# Altium PCB 2014_YaourtPhone_Antenne_PCB.PCBDOC
Units mil, origin at the board's own origin, x right, y up, seen from the top; angles counter-clockwise.
Board outline 1889.76 x 2540.48 mil, 4 copper layers (1-TOP, 2-GND, 3-SIGNAL, 4-BOTTOM); 27 components, 26 nets, 120 pads, 46 vias.
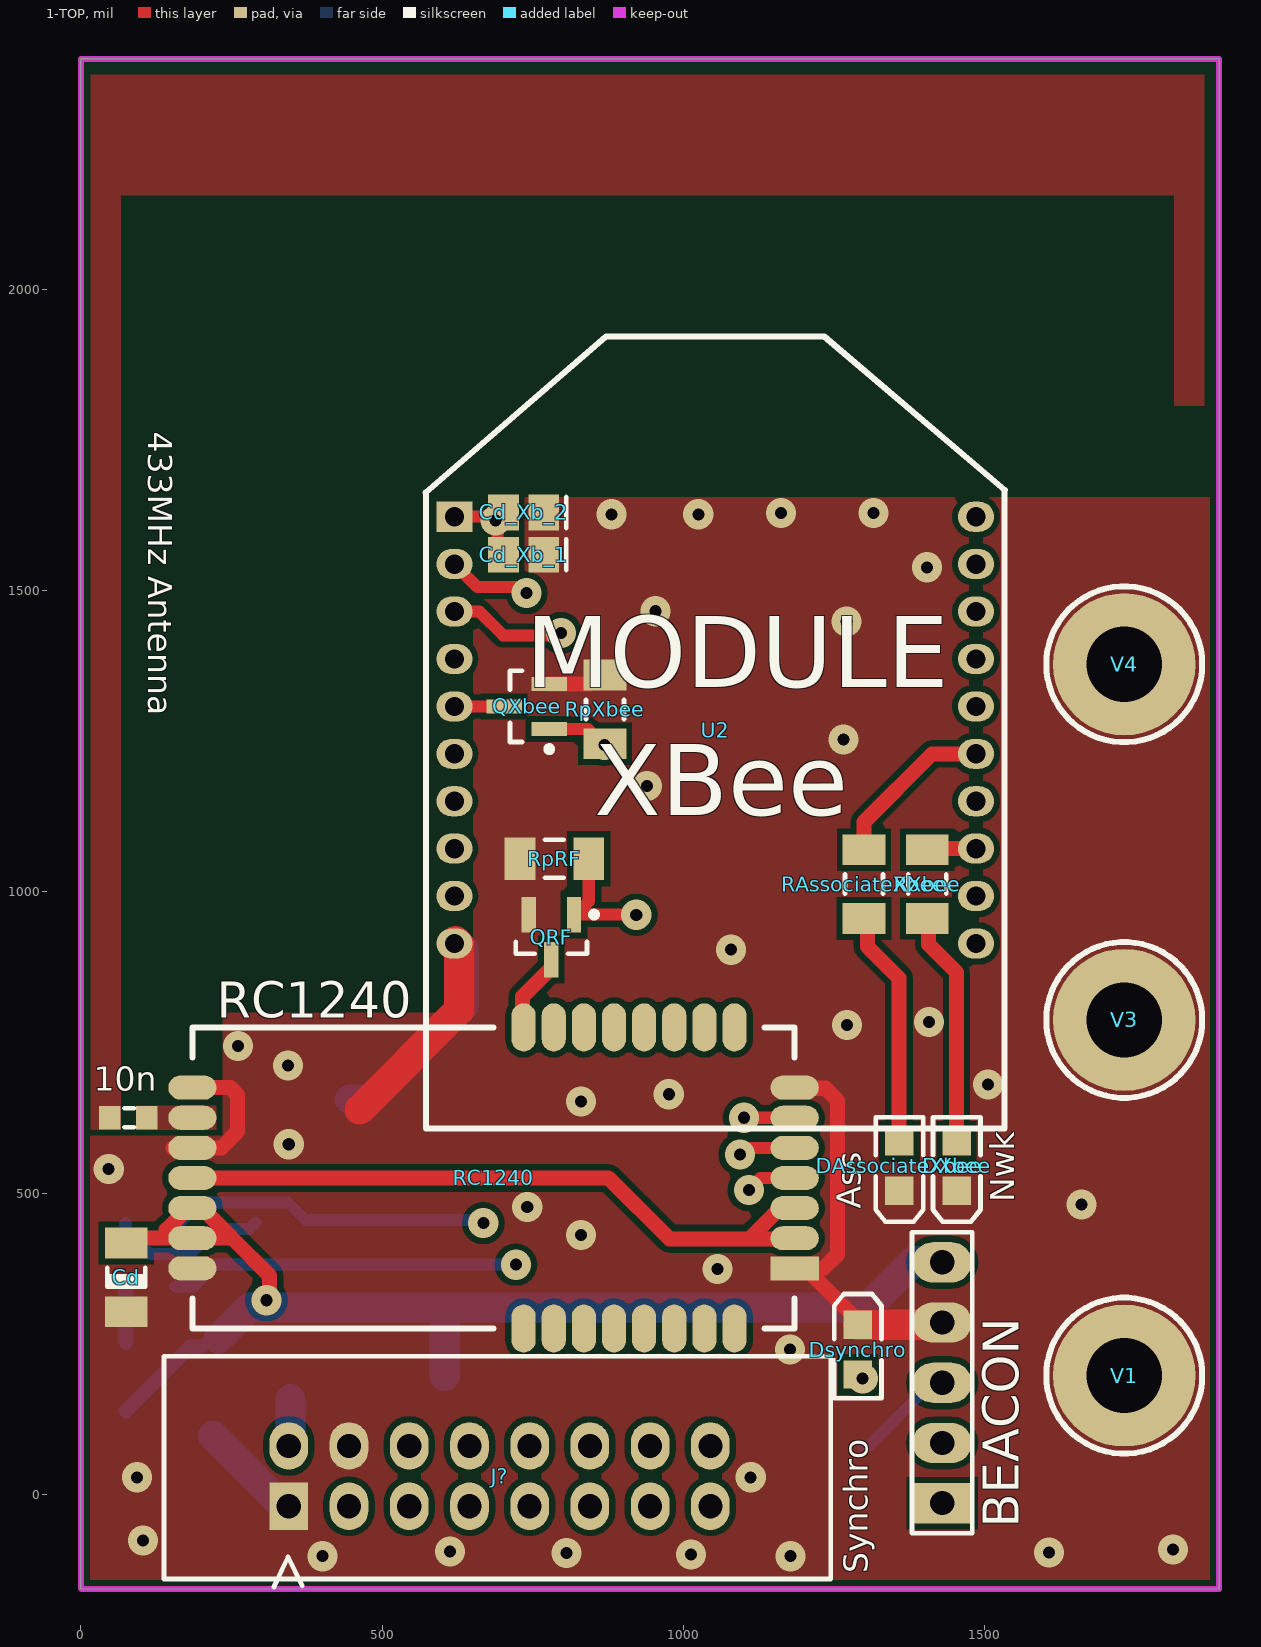
[diagram p0: 1-TOP view]
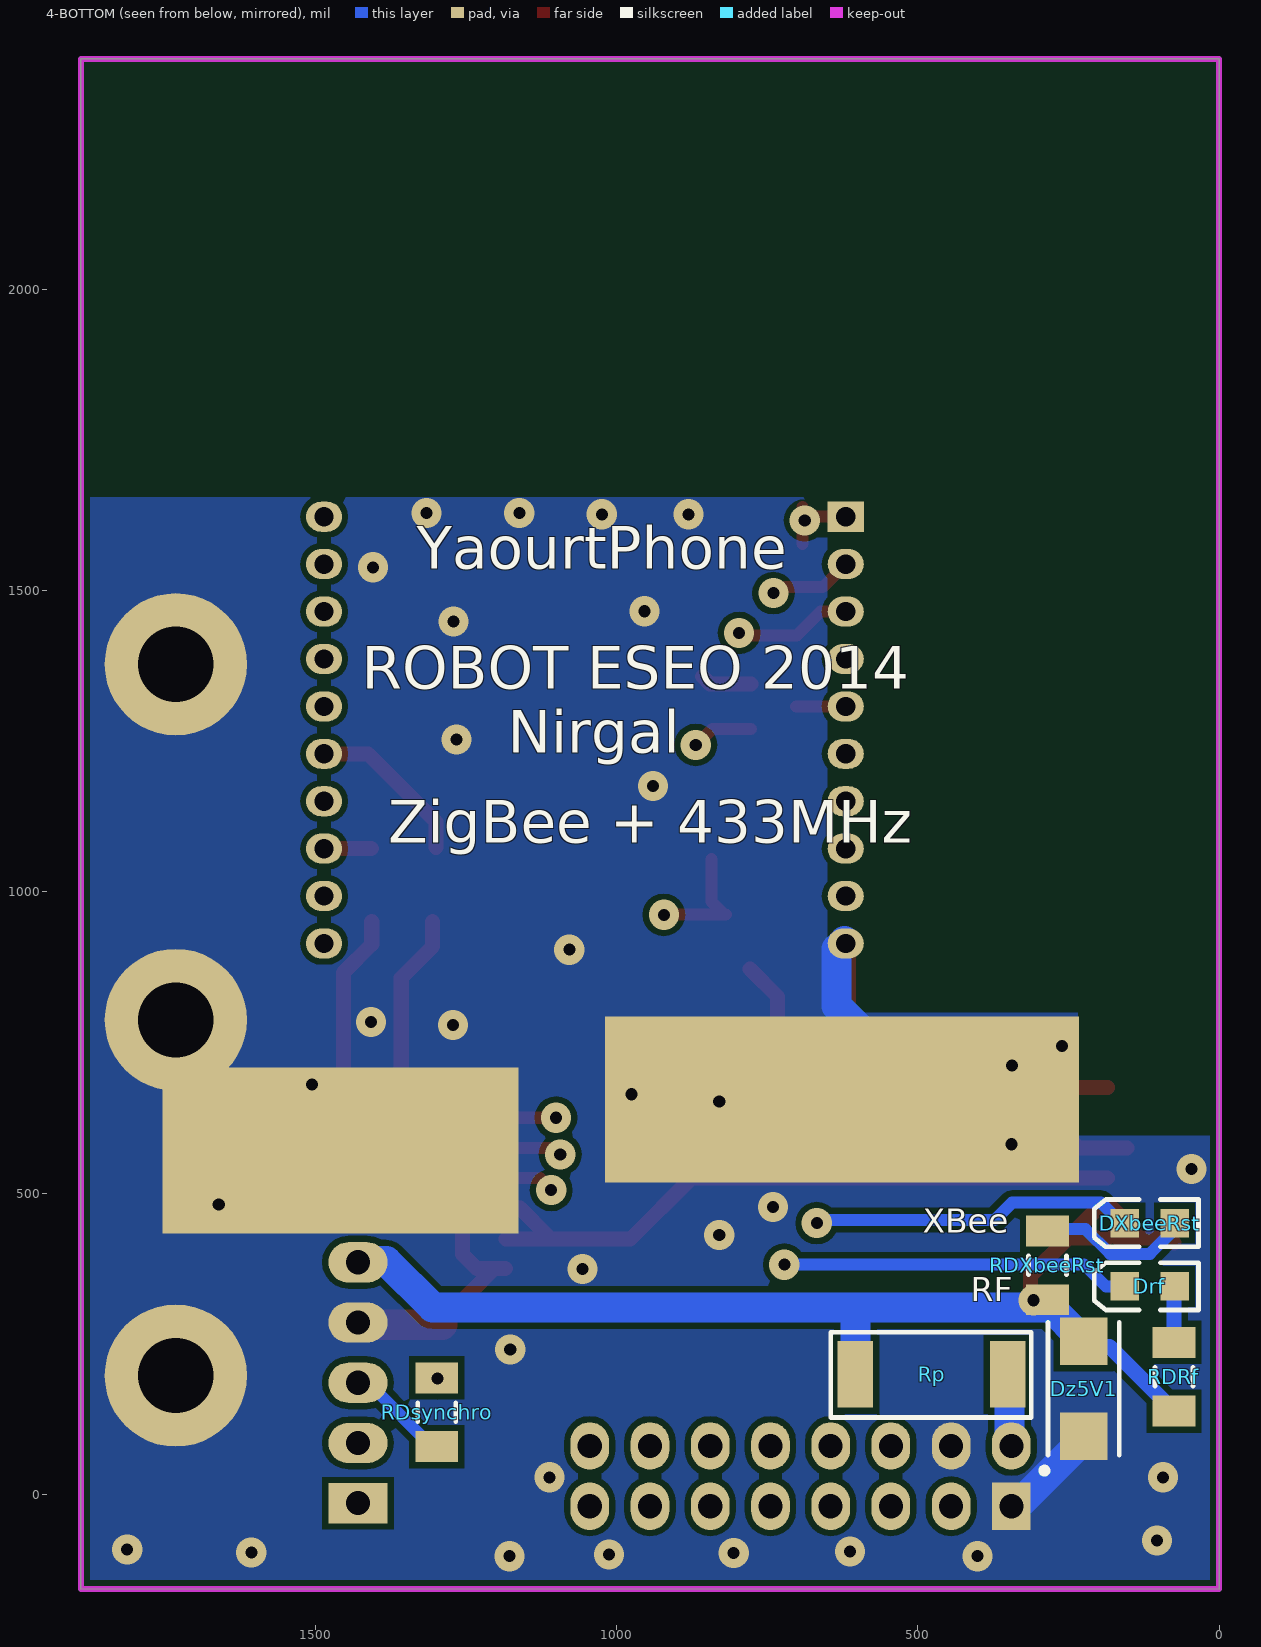
[diagram p1: 4-BOTTOM view, seen from below]
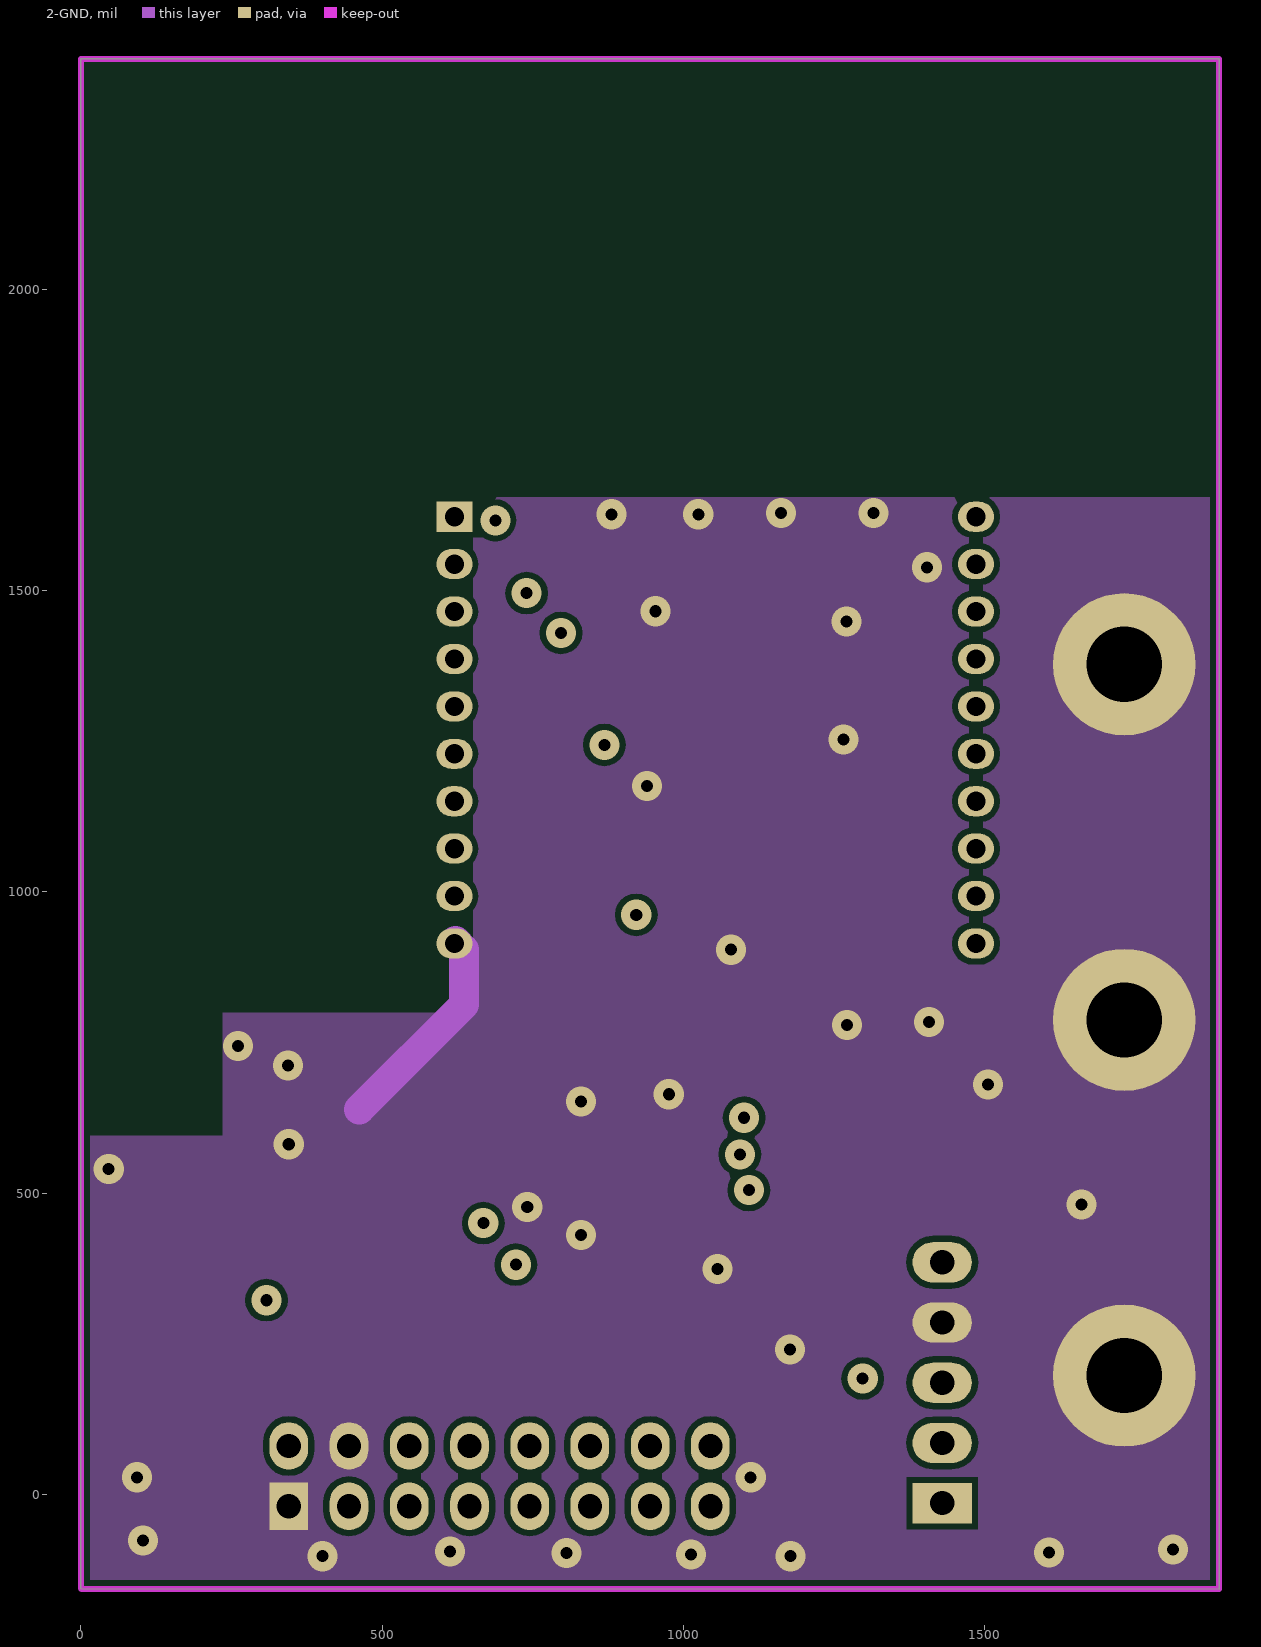
[diagram p2: 2-GND]
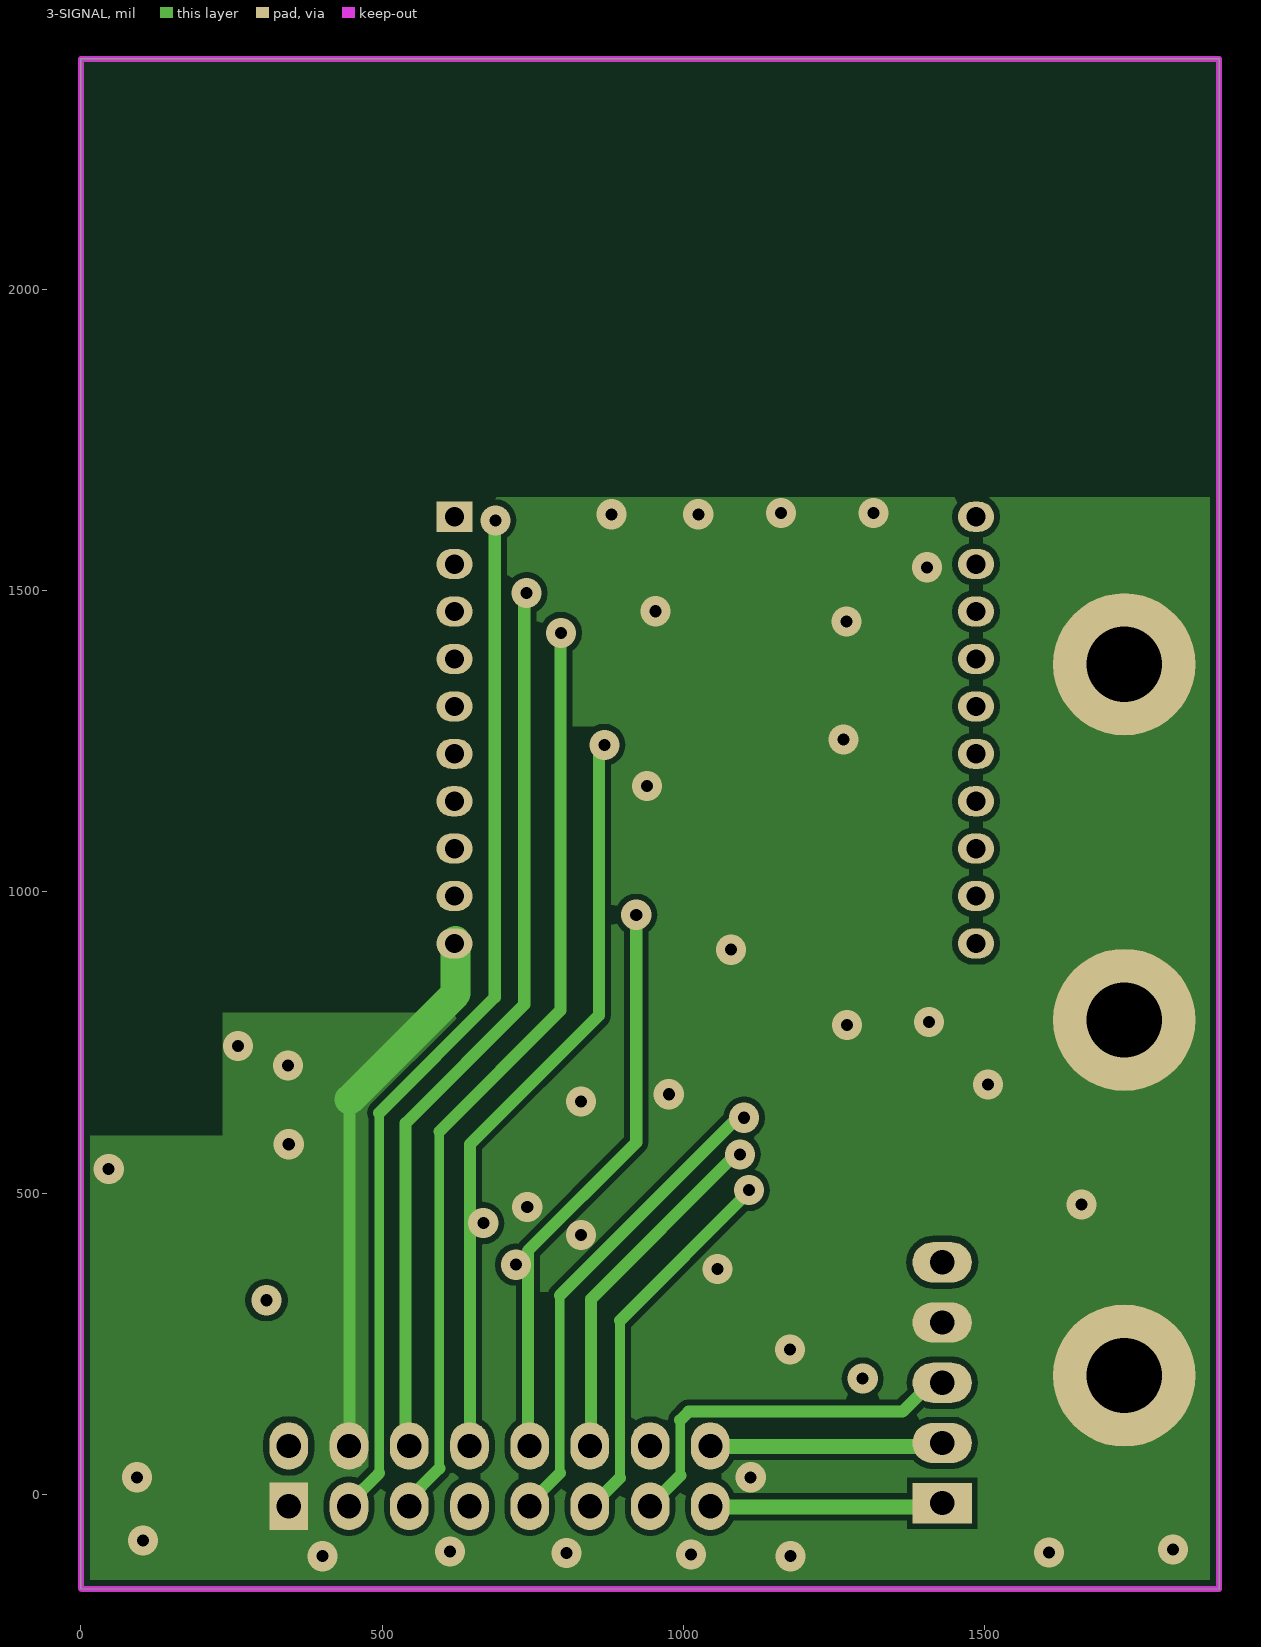
[diagram p3: 3-SIGNAL]
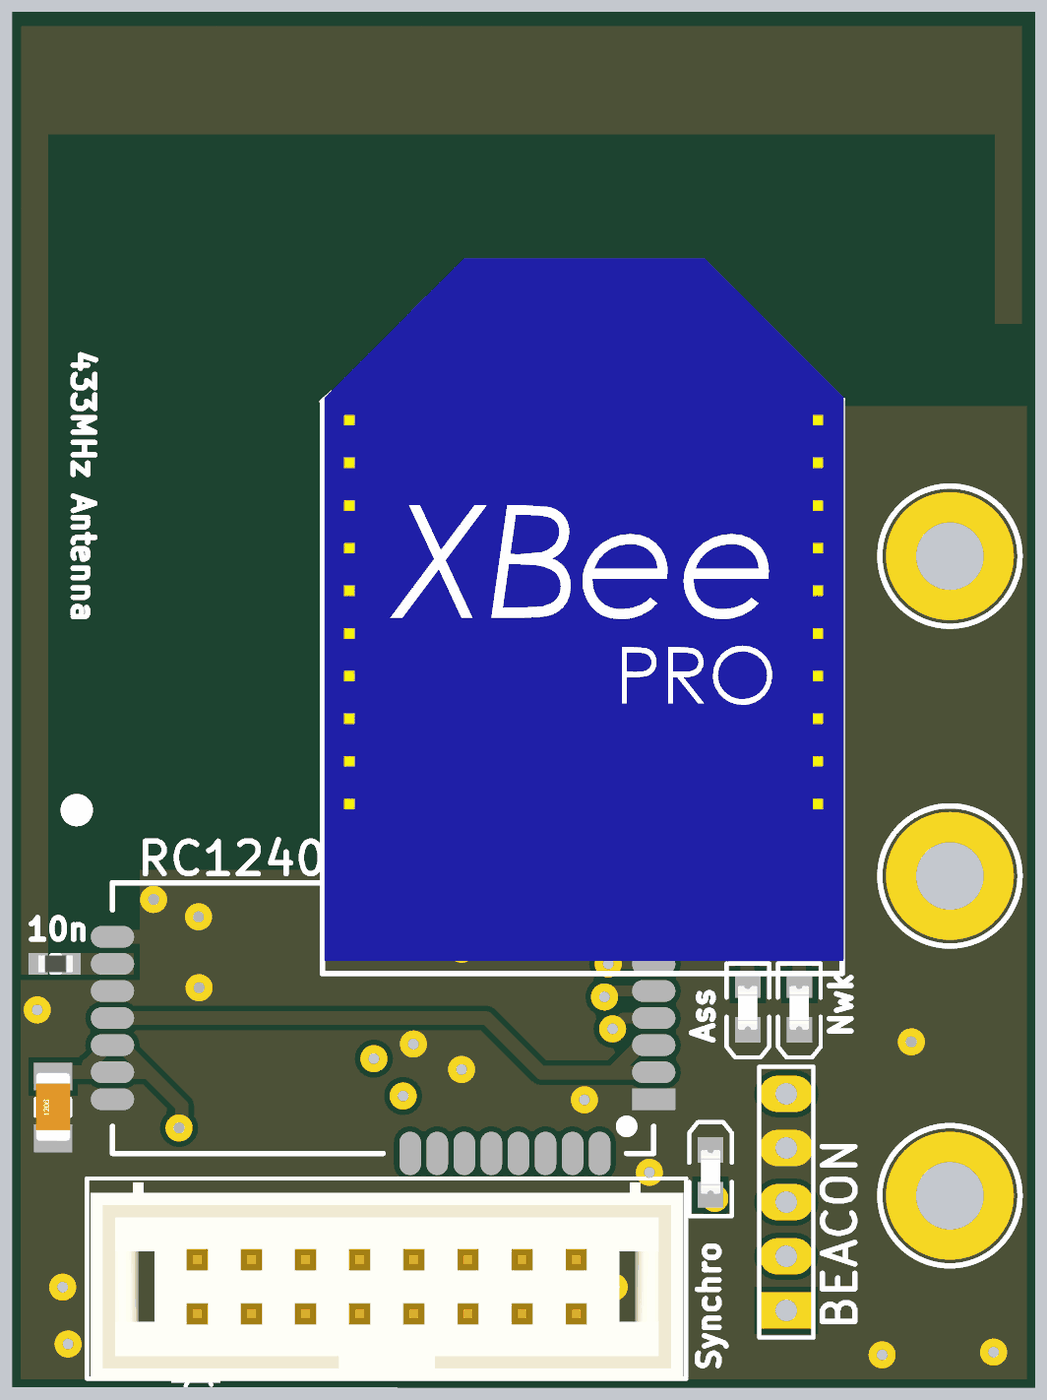
[diagram p4: 3D render of the assembled board from above, using the file's embedded part models]
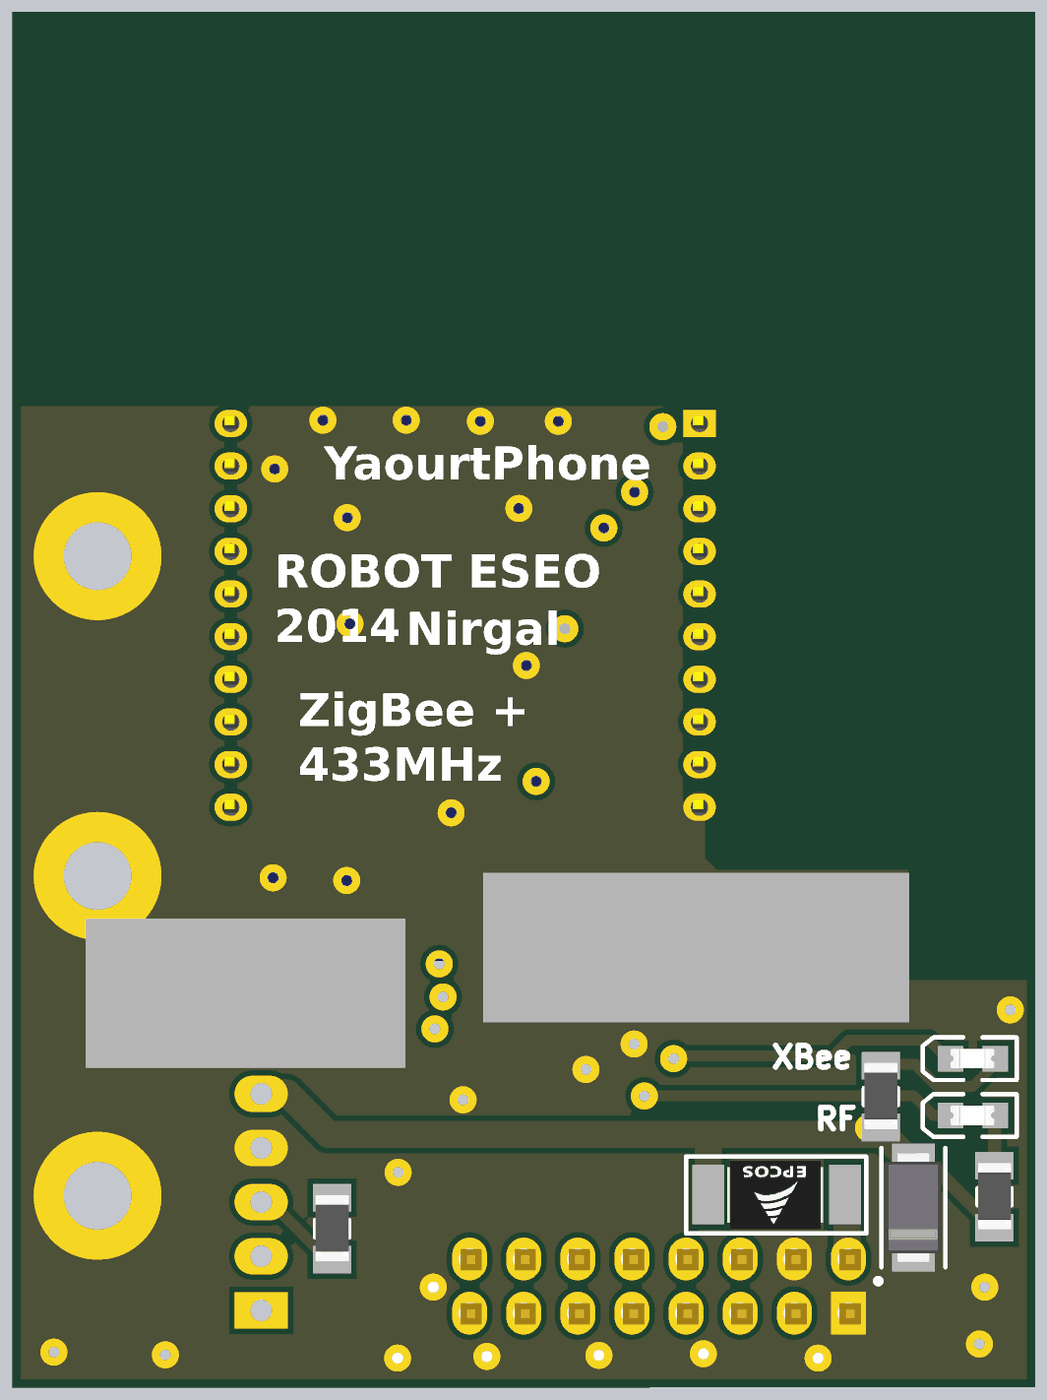
[diagram p5: 3D render of the assembled board from below, using the file's embedded part models]

## Layer stack, top to bottom
1-TOP: signal copper 1.4
Dielectric: prepreg 12.6, FR-4, Dk 4.8
2-GND: signal copper 1.4
Dielectric: core 12.6, FR-4, Dk 4.8
3-SIGNAL: signal copper 1.4
Dielectric: prepreg 12.6, FR-4, Dk 4.8
4-BOTTOM: signal copper 1.4

## Board outline
0,-157 0,2383 1889.76,2383 1889.76,-157.48

## Design rules (kind name [scope] priority, off if disabled: settings)
Clearance Clearance_1 [InNamedPolygon('1-GND') Or  InNamedPolygon('2-GND') Or  InNamedPolygon('3-GND') Or  InNamedPolygon('4-GND')] p1: gap=10
Clearance [All] p2: gap=7
FabricationTestPointUsage TestPointUsage [All] p1: valid=0 allowmultiple=FALSE
FabricationTestpoint Testpoint [All] p1: side=3 testpointundercomponent=TRUE minsize=40 maxsize=100 preferedsize=60 minholesize=0 maxholesize=40 preferedholesize=32 testpointgrid=1 allowsidetop=TRUE allowsidebottom=TRUE usegrid=TRUE gridtolerance=0.01
PlaneClearance [All] p1: clearance=10
PlaneConnect [All] p1: planeconnectstyle=Direct reliefexpansion=25 reliefentries=4 reliefconductorwidth=12 reliefairgap=15
PolygonConnect [All] p1: connectstyle=Direct reliefconductorwidth=10 reliefentries=4 polygonreliefangle="90 Angle"
RoomDefinition 2014_YaourtPhone_Antenne_PCB [InComponentClass('2014_YaourtPhone_Antenne_PCB')] p1: confinementstyle=ConfineIn formatcopy=TRUE lockcomponents=FALSE outline 1935.6,-102 2071.6,-102 2071.6,72 1935.6,72
RoutingLayers RoutingLayers_1 [All] p1: top layer_v5=TRUE mid layer 1_v5=FALSE mid layer 2_v5=FALSE bottom layer_v5=TRUE
RoutingLayers [All] p2: top layer_v5=TRUE mid layer 1_v5=FALSE mid layer 2_v5=FALSE bottom layer_v5=TRUE
RoutingVias [All] p1: holewidth=28 width=50 viastyle="Through Hole" minholewidth=28 minwidth=50 maxholewidth=28 maxwidth=50
SilkscreenOverComponentPads [All] p1: minsilkscreentomaskgap=10
SolderMaskExpansion [All] p1: expansion=0
Width [All] p1: maxlimit=150 minlimit=10 preferedwidth=15
22 further rules are at their usual default settings.

## Components (designator, comment, footprint, x,y, rotation, side; value= is the part's Value field where it differs from the comment)
10n "10nH" R0603_N 80,625 r180 top (schematic designator L?)
BEACON "Header 5" HDR1X5 1430,-15 r90 top
Cd "10nF" C1206_N 75,360 r90 top
Cd_Xb_1 "1uF" C0805_N 735,1560 r180 top
Cd_Xb_2 "10pF" C0805_N 735,1630 r180 top
DAssociateXbee "LED Jaune" LED_0805 1359,545 r270 top
Drf "LED" LED_0805 115,345 r0 bottom
Dsynchro "LED" LED_0805 1290,240 r90 top
DXbee "LED Verte" LED_0805 1454,545 r270 top
DXbeeRst "LED" LED_0805 115,450 r0 bottom
Dz5V1 "Diode Zener" "SMA Diode" 225,175 r90 bottom
J? "BARRETTE_8 CONTACTS_2 RANGEES_MALE_DROITE" "HE10/16_M_D_B P" 345,80 r0 top
QRF "Transistor MOSFET-N" SOT23-3N 781,925 r270 top
QXbee "Transistor MOSFET-N" SOT23-3N 740,1308 r180 top
RAssociateXbee "1k" R1206_N 1300,1013 r270 top
RC1240 "RC1240-Radiocraft" RC1240 1185,375 r180 top
RDRf "1K" R1206_N 75,195 r90 bottom
RDsynchro "150" R1206_N 1299,136 r90 bottom
RDXbeeRst "1K" R1206_N 285,380 r90 bottom
Rp "1R-1W" INDUCTANCE_CMS_1812 390,210 r0 bottom
RpRF "10k" R1206_N 786,1055 r180 top
RpXbee "10k" R1206_N 870,1303 r90 top
RXbee "1k" R1206_N 1405,1013 r270 top
U2 "XBee" MODULE_XBEE 620,1623 r0 top
V1 "Pad_M3" M3x6mm 1732.28,196.85 r0 top
V3 "Pad_M3" M3x6mm 1732.28,787.4 r0 top
V4 "Pad_M3" M3x6mm 1732.28,1377.95 r0 top

## Footprints (in the part's own frame and the unit in brackets; to place one, negate y for a bottom-side part, rotate by r counter-clockwise, add the part's x,y. Pads: shape width x height; smd on the part's side, far side on the other; paste and mask are expansions set on the pad)
C0805_N [mm] "Chip Capacitor, Body 2.0x1.3mm, IPC Medium Density"
  rect 1.3x1.5 smd: 1(-0.85,0) 2(0.85,0)
  silkscreen extent -1.8,-0.65 -1.8,0.65, body extent -0.99,-0.63 1.01,0.63, height 0.8
C1206_N [mm] "Chip Capacitor, Body 3.2x1.6mm, IPC Medium Density"
  rect 1.3x1.8 smd: 1(-1.45,0) 2(1.45,0)
  silkscreen extent -0.4,-0.8 0.4,0.8, body extent -1.57,-0.81 1.63,0.79, height 1.02
HDR1X5 [mm]
  rect 1.7x2.5 hole 1.016: 1(0,0)
  oval 1.7x2.5 hole 1.016: 2(2.54,0) 3(5.08,0) 4(7.62,0) 5(10.16,0)
  silkscreen extent -1.27,-1.27 11.43,1.27
"HE10/16_M_D_B P" [mm] "HE10 ; 16 CONTACTS ; MALE ;  DROIT; BAS PROFIL ; ESPACEMENTS BROCHES = 2.54 mm"
  rect 1.63x2 hole 1.016: 1(0,-2.54)
  oval 1.63x2 hole 1.016: 2(0,0) 3(2.54,-2.54) 4(2.54,0) 5(5.08,-2.54) 6(5.08,0) 7(7.62,-2.54) 8(7.62,0) 9(10.16,-2.54) 10(10.16,0) 11(12.7,-2.54) 12(12.7,0) 13(15.24,-2.54) 14(15.24,0) 15(17.78,-2.54) 16(17.78,0)
  silkscreen extent -5.26,-5.95 22.86,3.78, body extent -5.1,-5.8 22.72,3.6, height 8.8
INDUCTANCE_CMS_1812 [mil] "INDUCTANCE CMS 1812 ; DIMENSIONS : 4.5mm x 3.2mm"
  rect 59.06x110.24 smd: 1(-39,11) 2(214,11)
  silkscreen extent -78,-59 255,83, body extent 2,-51 179,75, height 127
LED_0805 [mm] "SM LED; 2 Flat Leads"
  rect 1.2x1.2 smd: 1(-1.05,0) 2(1.05,0)
  silkscreen extent -2.05,-1 2.35,1, body extent -1.05,-0.64 1.06,0.64, height 1.2
M3x6mm [mm] "Vis M3 X 6mm"
  round 6 hole 3.175: 1(0,0)
  silkscreen extent -3.29,-3.28 3.29,3.28
MODULE_XBEE [mil] "XBee Series 2 OEM RF Modules"
  rect 60x50 hole 32: 1(0,0)
  oval 60x50 hole 32: 2(0,-78.74) 3(0,-157.48) 4(0,-236.22) 5(0,-314.96) 6(0,-393.7) 7(0,-472.44) 8(0,-551.18) 9(0,-629.92) 10(0,-708.66) 11(866.14,-708.66) 12(866.14,-629.92) 13(866.14,-551.18) 14(866.14,-472.44) 15(866.14,-393.7) 16(866.14,-314.96) 17(866.14,-236.22) 18(866.14,-157.48) 19(866.14,-78.74) 20(866.14,0)
  silkscreen extent -48,-1016 914,299, body extent -43,-992 917,305, height 205
R0603_N [mm] "Chip Resistor, Body 1.6x0.8mm, IPC Medium Density"
  rect 0.9x1 smd: 1(-0.737,0) 2(0.813,0)
  silkscreen extent -0.2,-0.4 0.2,0.4, body extent -0.85,-0.48 0.85,0.48, height 0.6
R1206_N [mm] "Chip Resistor, Body 3.2x1.6mm, IPC Medium Density"
  rect 1.3x1.8 smd: 1(-1.45,0) 2(1.45,0)
  silkscreen extent -0.4,-0.8 0.4,0.8, body extent -1.68,-0.87 1.68,0.87, height 0.71
RC1240 [mil]
  round 40 on Top Overlay: 0(50,50)
  rect 80x40 smd: 1(0,0)
  oval 80x40 smd: 2(0,-50) 3(0,-100) 4(0,-150) 5(0,-200) 6(0,-250) 7(0,-300) 8(1000,-300) 9(1000,-250) 10(1000,-200) 11(1000,-150) 12(1000,-100) 13(1000,-50) 14(1000,0)
  oval 40x80 smd: 15(100,-400) 16(150,-400) 17(200,-400) 18(250,-400) 19(300,-400) 20(350,-400) 21(400,-400) 22(450,-400) 23(450,100) 24(400,100) 25(350,100) 26(300,100) 27(250,100) 28(200,100) 29(150,100) 30(100,100)
  silkscreen extent 0,-400 1000,100
"SMA Diode" [mm] "Case 403D-02"
  rect 2x2 smd: 1(-2,0) 2(2,0)
  silkscreen extent -3.57,-1.5 2.8,1.78, body extent -2.8,-1.46 2.79,1.46, height 2.41
SOT23-3N [mm] "SOT23, 3-Leads, Body 2.9x1.3mm, Pitch 0.95mm, Lead Span 2.5mm, IPC Medium Density"
  rect 1.5x0.6 smd: 1(-0.95,0.95) 2(-0.95,-0.95) 3(0.95,0)
  silkscreen extent -1.07,-1.5 0.7,1.93, body extent -1.24,-1.5 1.23,1.5, height 1.1

## Part data
10n: library part Inductance, "Inductor"
BEACON: "Header, 5-Pin"
Cd Cd_Xb_1 Cd_Xb_2: library part Condensateur, "Capacitor"
DAssociateXbee DXbee: library part LED, "Typical LED"
Drf Dsynchro DXbeeRst: "Typical LED"
Dz5V1: "Zener Diode"
QRF QXbee: "N-Channel MOSFET"
RAssociateXbee RDRf RDsynchro RDXbeeRst Rp RpRF RpXbee RXbee: library part Resistor, "Resistor"
RC1240: "RC1240 - Radiocraft 433MHz Transceiver"
V1 V3 V4: library part "Vis M3 X 6mm _TORX_Tête 6mm", "Vis M3 X 6mm _TORX_Tête 6mm"

## Free pads (board coordinates)
  round 60 on Top Overlay: 0(119,909)
  rect 787.4x275.59 smd far side: 0(626,655)
  rect 590.55x275.59 smd far side: 0(1459,571)

## Via types
v1: diameter 50, hole 20, 1-TOP to 4-BOTTOM, 46 vias

## Nets (pads, with @x,y where several pads share a name; then routed paths per layer and width w, separated by ;. In a path a pad name is that pad's centre, name@x,y a point inside that pad or via, vN(x,y) a via of type N, cw(c..) or ccw(c..) an arc to the next point about the centre after c; other vN are vias at no path point)
3V: Cd_Xb_1.2 Cd_Xb_2.2 J?.3 U2.1 | length 1860.4
  1-TOP w20: U2.1 Cd_Xb_2.2@690,1623 ; Cd_Xb_1.2@691.54,1578 Cd_Xb_2.2@691.54,1639
  3-SIGNAL w16: 495,35 495,633
  3-SIGNAL w20: J?.3@447,-13 495,35 ; 495,633 687,825 v1@687,1617
  other v1: 688,1617
5V: BEACON.5 Cd.2 Dz5V1.2 RC1240.12 RC1240.13 RDRf.1 RDXbeeRst.1 Rp.2 | length 1956.9
  1-TOP w25: Cd.2 82.91,425 141,425 ; 141,439 141,425 ; 142,439 178,475 RC1240.12 201,475 250,426 ; RC1240.13@169,425 141,425 ; RC1240.13 251,425 313,363 v1@313,346
  4-BOTTOM w25: RDRf.1 182.09,245 Dz5V1.2@200,245
  4-BOTTOM w50: Dz5V1.2@228,258 280,310 1306,310 1383,387 BEACON.5@1430,387 ; Rp.2@604,196 604,302.91
  other v1: 308,322
5VIN: J?.2 Rp.1 | length 73
  4-BOTTOM w50: J?.2@348,85 Rp.1@348,158
ANTENNA: 10n.2
CANH: BEACON.1 J?.15 | length 393
  3-SIGNAL w25: J?.15@1043,-21 BEACON.1@1436,-21
CANL: BEACON.2 J?.16 | length 385
  3-SIGNAL w25: J?.16@1043,79 BEACON.2@1428,79
GND: BEACON.4 Cd.1 Cd_Xb_1.1 Cd_Xb_2.1 DAssociateXbee.2 Dsynchro.2 DXbee.2 Dz5V1.1 J?.1 J?.4 pad.0@626,655 pad.0@1459,571 QRF.2 QXbee.2 RC1240.1 RC1240.7 RC1240.8 RC1240.10 RC1240.14 RpRF.2 RpXbee.2 U2.10 V1.1 V3.1 V4.1 | length 3166.5
  1-TOP w25: RC1240.10@153,575 RC1240.10@176,575 ; RC1240.10@180,575 RC1240.10 233,575 260,602 260,663 248,675 RC1240.8 ; QXbee.2 845.4,1345.4 RpXbee.2@858,1358 ; RC1240.1 RC1240.1@1203,375 ; RC1240.7@1185,674 1236,674 1256,654 1256,398 1233,375 RC1240.1@1203,375 ; Dsynchro.2@1291,287 RC1240.1@1203,375
  1-TOP w50: 462.5,638.5 628,804 628,912 U2.10@622,918 ; Dsynchro.2 BEACON.4@1434.34,281.34
  2-GND w50: 462,639 636,813 636,904 U2.10@622,918
  3-SIGNAL w20: J?.4@436,93 446,103 446,655
  3-SIGNAL w50: 446,655 622,831 U2.10@622,918
  4-BOTTOM w50: Dz5V1.1@219,97 J?.1@336,-20 ; pad.0@446,655 479,655 635,811 635,905 U2.10@622,918
  other v1: 401,-103 1178,-103 1013,-100 806,-98 1607,-97 613,-95 1813,-92 103,-77 93,28 1112,28 1177,240 1057,374 830,430 741,477 1661,481 46,540 345,581 830,652 976,664 1506,680 344,712 261,744 1272,779 1408,784 1079,904 940,1176 1266,1253 1271,1449 954,1466 1405,1539 881,1627 1025,1627 1162,1629 1316,1629
NetDAssociateXbee_1: DAssociateXbee.1 RAssociateXbee.2 | length 395.5
  1-TOP w25: RAssociateXbee.2@1306,951 1306,909 1358,857 DAssociateXbee.1@1358,583 ; DAssociateXbee.1@1362,591 DAssociateXbee.1@1362,597
NetDrf_1: Drf.1 RDRf.2 | length 92.9
  4-BOTTOM w25: RDRf.2 Drf.1@75,345
NetDsynchro_1: Dsynchro.1 RDsynchro.2 | length 1.4
  1-TOP w20: Dsynchro.1@1299,198 Dsynchro.1@1300,197
  other v1: 1298,192
NetDXbee_1: DXbee.1 RXbee.2 | length 411.5
  1-TOP w25: RXbee.2@1407,951 1407,913 1454,866 DXbee.1@1454,581 ; DXbee.1@1454,588 1454,610
NetDXbeeRst_1: DXbeeRst.1 RDXbeeRst.2 | length 264.7
  4-BOTTOM w20: DXbeeRst.1 73.66,440.34 115,399 181,399 222,440 279,440 RDXbeeRst.2@290,451
NetL?_1: 10n.1 RC1240.9
NetQRF_3: QRF.3 RC1240.22 | length 102.1
  1-TOP w25: RC1240.22@733,789 733,826 QRF.3@779,872
NetQXbee_3: QXbee.3 U2.5 | length 79.6
  1-TOP w20: U2.5@623,1308 QXbee.3
NetRAssociateXbee_1: RAssociateXbee.1 U2.15 | length 275.1
  1-TOP w25: RAssociateXbee.1@1300,1074 1300,1116 1413.3,1229.3 U2.15
NetRXbee_1: RXbee.1 U2.13 | length 78.3
  1-TOP w25: RXbee.1@1407.82,1071.82 U2.13
STR_RF_CONFIG: J?.11 RC1240.4 | length 728.1
  1-TOP w20: v1@1107,504 1128,525 RC1240.4
  3-SIGNAL w16: 895,27 895,288
  3-SIGNAL w20: J?.11@845,-23 895,27 ; 895,288 v1@1114,507
  other v1: 1109,505
STR_RF_RESET: Drf.2 J?.10 QRF.1 RpRF.1 | length 1738.5
  1-TOP w20: QRF.1 v1@922,962.4 ; QRF.1@822,963 843.09,984.09 RpRF.1
  3-SIGNAL w20: J?.10@742,85 742,383 742,404 922,584 v1(922,962)
  4-BOTTOM w20: Drf.2 188,345 224,381 v1@724,381
  other v1: 722,381
STR_RF_RX: J?.12 RC1240.5 | length 665.1
  1-TOP w20: v1@1098,562 1111,575 RC1240.5
  3-SIGNAL w20: J?.12@847,85 847,324 v1@1083,560
  other v1: 1094,564
STR_RF_TX: J?.9 RC1240.6 | length 867.6
  1-TOP w20: v1(1101,625) RC1240.6
  3-SIGNAL w16: 795,35 795,330
  3-SIGNAL w20: J?.9@745,-15 795,35 ; 795,330 v1@1090.5,625.5
STR_SYNCHRO: BEACON.3 J?.13 RDsynchro.1 | length 805.9
  3-SIGNAL w16: 995,31 995,123
  3-SIGNAL w20: J?.13@943,-21 995,31 ; 995,123 1009,137 1364,137 1410,183 BEACON.3@1439,183
  4-BOTTOM w20: RDsynchro.1 1306.91,78.91 1412,184 BEACON.3@1427,184
STR_XBEE_RESET: DXbeeRst.2 J?.8 QXbee.1 RpXbee.1 | length 1873.4
  1-TOP w20: QXbee.1 841.4,1270.6 RpXbee.1@864,1248
  3-SIGNAL w20: J?.8@646,85 646,581 860,795 v1@860,1246
  4-BOTTOM w20: DXbeeRst.2 162,450 196,484 344,484 373,455 v1@658,455
  other v1: 668,450 869,1244
STR_XBEE_RX: J?.6 U2.2 | length 1629.4
  1-TOP w20: U2.2 658.26,1506 v1@742,1506
  3-SIGNAL w20: J?.6@539,85 539,616 736,813 v1@736,1495
  other v1: 740,1496
STR_XBEE_TX: J?.5 U2.3 | length 1746.2
  1-TOP w20: U2.3 661.48,1465.52 701,1426 v1@800,1426
  3-SIGNAL w16: 595,43 595,602
  3-SIGNAL w20: J?.5@538,-14 595,43 ; 595,602 796,803 v1@796,1429
  other v1: 797,1430
VDD_RC1240: RC1240.2 RC1240.3 RC1240.11 | length 1132.7
  1-TOP w25: RC1240.11 876,525 977,424 RC1240.2@1184,424 ; 1113,427 1161,475 RC1240.3
pads on no net: J?.7 J?.14 RC1240.0 RC1240.15 RC1240.16 RC1240.17 RC1240.18 RC1240.19 RC1240.20 RC1240.21 RC1240.23 RC1240.24 RC1240.25 RC1240.26 RC1240.27 RC1240.28 RC1240.29 RC1240.30 U2.4 U2.6 U2.7 U2.8 U2.9 U2.11 U2.12 U2.14 U2.16 U2.17 U2.18 U2.19 U2.20

## Polygon pours and split planes (outlines as drawn)
GND on 1-TOP "1-GND" (solid, remove dead copper, pour order 1006): 651,1655 1875,1655 1875,-145 15,-145 15,595 235,595 235,799 651,799
NetL?_1 on 1-TOP "TOP_ANTENNA1" (solid): 225,645 225,605 92,605 92,645
ANTENNA on 1-TOP "TOP_ANTENNA1" (solid): 1865,1807 1815,1807 1815,2357 1865,2357
ANTENNA on 1-TOP "TOP_ANTENNA1" (solid): 1865,2357 1865,2157 16,2157 16,2357
ANTENNA on 1-TOP "TOP_ANTENNA1" (solid): 66,605 16,605 16,2357 66,2357
GND on 2-GND "2-GND" (solid, remove dead copper, pour order 1006): 651,1655 1875,1655 1875,-145 15,-145 15,595 235,595 235,799 651,799
GND on 3-SIGNAL "3-GND" (solid, remove dead copper, pour order 1006): 651,1655 1875,1655 1875,-145 15,-145 15,595 235,595 235,799 651,799
GND on 4-BOTTOM "4-GND" (solid, remove dead copper, pour order 1006): 651,1655 1875,1655 1875,-145 15,-145 15,595 235,595 235,799 651,799

## Keep-outs
Keep-Out Layer:
  lines w10: 0,-157 0,2383 1889.76,2383 1889.76,-157.48 0.48,-157.48 0,-157

## Other copper
3-SIGNAL:
  pour cut-out: 814,1275 857,1275 857,1242 814,1242
  pour cut-out: 745,336 788,336 788,303 745,303

## Silkscreen, mask and mechanical layers (free items; w line width, h text height)
Top Overlay:
  text "433MHz Antenna" at 112,1764 h40 r270
  text "Nwk" at 1550,485 h40 r90
  text "Ass" at 1295,474 h40 r90
  text "Synchro" at 1306,-131 h40 r90
Bottom Overlay:
  text "YaourtPhone" at 1332,1513 h120
  text "ROBOT ESEO 2014" at 1424,1314 h120
  text "Nirgal" at 1181,1208 h120
  text "ZigBee + 433MHz" at 1380,1058 h120
  text "XBee" at 492,434 h40
  text "RF" at 412,320 h40
Mechanical 15:
  lines w19.68: 1574.8,2952.76 1574.8,0 3149.61,0 3149.61,3149.61 0,3149.61 0,2952.76 3149.61,2952.76 ; 3029.64,2511.66 3767.18,2316.58 ; 3062,2430.41 3028.37,2514.84 3110.39,2547.51
  lines w393.7: 312,2695 2910.43,2695
  text "plaque 4mm ALU + velcro" at 331,3025 h60
  text "Carte Beacon_IR" at 3814,2300 h60
  text "Support vertical" at 2509,833 h60 r90
  text "Ideallement non metallique" at 2681,568 h60 r90

## Dimensions
0,2952.76 to 0,2383 on Mechanical 15
3149.61,0 to 3149.61,3149.61 on Mechanical 15
3149.61,3149.61 to 1574.8,2952.76 on Mechanical 15
0,2383 to 0,-157.48 on Mechanical 15
0,3149.61 to 1574.8,2952.76 on Mechanical 15
0,-159 to 1889.76,-157.48 on Mechanical 15
3149.61,2952.76 to 3149.61,3149.61 on Mechanical 15
3149.61,0 to 3149.61,2952.76 on Mechanical 15
3149.61,0 to 1732.28,1377.95 on Mechanical 15
3149.61,0 to 1732.28,787.4 on Mechanical 15
3149.61,0 to 1732.28,196.85 on Mechanical 15
1889.76,-157.48 to 1574.8,0 on Mechanical 15

## Text inside footprints (layer, text, board x,y; h text height)
U2: Top Overlay "MODULE" at 738.11,1339.54 h118.11